# Altium PCB PWR-Buck-Boost 2V to 5V-Layout.PcbDoc
Units mil, origin at the board's own origin, x right, y up, seen from the top; angles counter-clockwise.
Board outline not stored, 2 copper layers (Top Layer, Bottom Layer); 8 components, 0 nets, 22 pads, 9 vias.
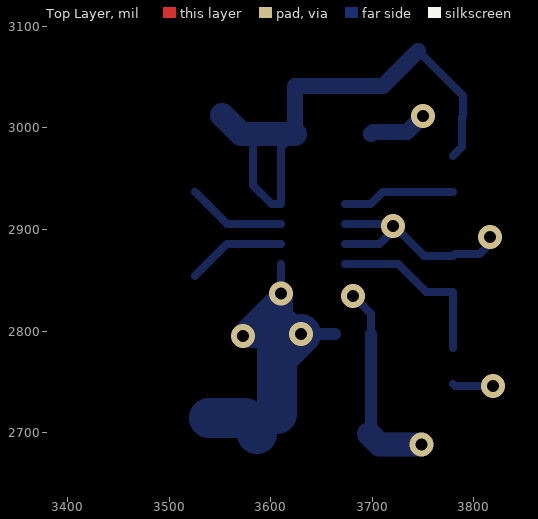
[diagram p0: Top Layer view]
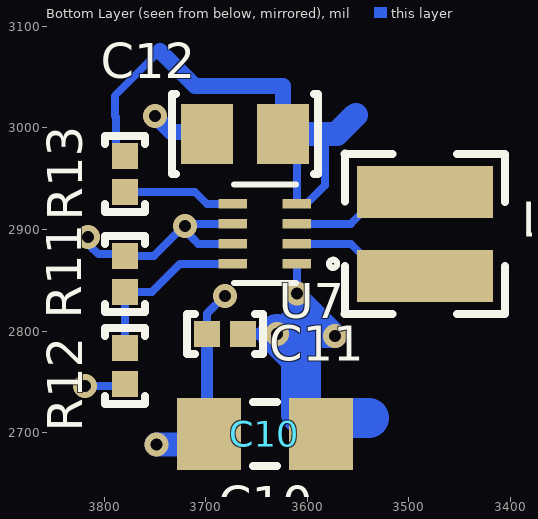
[diagram p1: Bottom Layer view, seen from below]

## Layer stack, top to bottom
Top Solder: solder mask 0.4, Solder Resist, Dk 3.5
Top Layer: signal copper 1.4
Dielectric 1: dielectric 12.6, FR-4, Dk 4.8
Bottom Layer: signal copper 1.4
Bottom Solder: solder mask 0.4, Solder Resist, Dk 3.5

## Components (designator, comment, footprint, x,y, rotation, side; value= is the part's Value field where it differs from the comment)
C10 "Cap 100uF 1206" C_3216[1206] 3641.73,2698.82 r180 bottom value=100uF
C11 "Cap 100nF 0402" C_1005[0402] 3681.1,2797.24 r180 bottom value=100nF
C12 "Cap 10uF 0805" C_2012[0805] 3661.42,2994.09 r180 bottom value=10uF
L1 "Ind 1UH 2.75A 51mOHM SMD" L_3030[1212] 3484.25,2895.67 r270 bottom value=1uH
R11 "Res 91k 1% 0402" R_1005[0402] 3779.53,2856.3 r90 bottom value=91k
R12 "Res 806k 1% 0402" R_1005[0402] 3779.53,2765.75 r270 bottom value=806k
R13 "Res 4k7 1% 0402" R_1005[0402] 3779.53,2954.72 r90 bottom value=4k7
U7 "TPS631000DRLR" U_SOT583_50P210X120X60-8 3641.74,2895.67 r90 bottom

## Footprints (in the part's own frame and the unit in brackets; to place one, negate y for a bottom-side part, rotate by r counter-clockwise, add the part's x,y. Pads: shape width x height; smd on the part's side, far side on the other; paste and mask are expansions set on the pad)
C_1005[0402] [mm] "Chip capacitor; Body 1.1 x 0.5 mm (LxW typ)"
  rect 0.65x0.65 smd: 1(-0.45,0) 2(0.45,0)
  silkscreen extent -0.95,-0.5 0.95,0.5, body extent -0.51,-0.25 0.51,0.25, height 0.51
C_2012[0805] [mm] "Chip Resistor; Body 2.0 x 1.3 mm (LxW typ)"
  rect 1.3x1.5 smd: 1(-0.95,0) 2(0.95,0)
  silkscreen extent -1.83,-1 1.83,1, body extent -1,-0.62 1,0.63, height 0.78
C_3216[1206] [mm] "Capacitor MLCC; Body 3.2 x 1.6 mm (LxW typ)"
  rect 1.6x1.8 smd: 1(-1.4,0) 2(1.4,0)
  silkscreen extent -0.3,-0.8 0.3,0.8, body extent -1.6,-0.8 1.6,0.8, height 1
L_3030[1212] [mm]
  rect 1.3x3.4 smd: 1(-1.05,0) 2(1.05,0)
  silkscreen extent -2.01,-2.01 2.01,2.01, body extent -1.5,-1.5 1.5,1.5, height 1.22
R_1005[0402] [mm] "Chip resistor; Body 1.1 x 0.5 mm (LxW typ)"
  rect 0.65x0.65 smd: 1(-0.45,0) 2(0.45,0)
  silkscreen extent -0.95,-0.5 0.95,0.5, body extent -0.5,-0.25 0.5,0.26, height 0.36
U_SOT583_50P210X120X60-8 [mil] "SOT-583"
  rect 9x28 smd paste+0 mask+0: 1(-29.53,-31.5) 2(-9.84,-31.5) 3(9.84,-31.5) 4(29.53,-31.5) 5(29.53,31.5) 6(9.84,31.5) 7(-9.84,31.5) 8(-29.53,31.5)
  silkscreen extent -48,-71 48,31, body extent -44,-34 44,34, height 27

## Part data
C10: library part CAP005, "Capacitor type 1", Dielectric=X5R, Manufacturer 1=Murata, Manufacturer Part Number 1=GRM31CR61A107MEA8L, Rated Voltage=10V, Supplier Part Number 1=C883598, Tolerance=20%, CEGEP=KCOND04SM, LibRef=CAP005, Mounting Technology=SMT, Supplier 1=LCSC
C11: library part CAP001, "Capacitor type 1", Dielectric=X7R, Manufacturer 1="Taiyo Yuden", Manufacturer Part Number 1=UMK105B7104KV-FR, Rated Voltage=50V, Supplier Part Number 1=C2167491, Tolerance=10%, CEGEP=KCOND01SM, LibRef=CAP001, Mounting Technology=SMT, Supplier 1=LCSC
C12: library part CAP004, "Capacitor type 1", Dielectric=X5R, Manufacturer 1=Samsung, Manufacturer Part Number 1=CL21A106KAYNNNE, Rated Voltage=25V, Supplier Part Number 1=C15850, Tolerance=10%, CEGEP=KCOND03SM, LibRef=CAP004, Mounting Technology=SMT, Supplier 1=LCSC
L1: library part IND001, "Inductor type 1", Manufacturer 1="Murata Electronics", Manufacturer Part Number 1=LQH3NPN1R0MMEL, Saturation Current=2.3A, Supplier Part Number 1=C703777, Tolerance=0,2, CEGEP=KPTSO09, DCR=0.025R, LibRef=IND001, Mounting Technology=SMT, Supplier 1=LCSC
R11: library part RES011, "Resistor type 1", Manufacturer 1=Panasonic, Manufacturer Part Number 1=ERJ-2RKF9102X, Max Working Voltage=50V, Supplier Part Number 1=C413106, Tolerance=1%, LibRef=RES011, Mounting Technology=SMT, Puissance=1/16W, Supplier 1=LCSC
R12: library part RES013, "Resistor type 1", Manufacturer 1=Panasonic, Manufacturer Part Number 1=ERJ-2RKF8063X, Max Working Voltage=50V, Supplier Part Number 1=C416577, Tolerance=1%, LibRef=RES013, Mounting Technology=SMT, Puissance=1/16W, Supplier 1=LCSC
R13: library part RES007, "Resistor type 1", Manufacturer 1=Panasonic, Manufacturer Part Number 1=ERJ-2RKF4701X, Max Working Voltage=50V, Supplier Part Number 1=C400631, Tolerance=1%, LibRef=RES007, Mounting Technology=SMT, Puissance=1/16W, Supplier 1=LCSC
U7: library part U_TPS631000DRLR, "buck-boost converter 1.5-A output current,", Manufacturer 1="Texas Instruments", Supplier Part Number 1=C5219190, Manufacturer Part Number 1=TPS631000DRLR, Mounting Technology=SMT, Supplier 1=LCSC, Supplier 2=Digikey, Supplier Part Number 2=296-TPS631000DRLRCT-ND

## Via types
v1: diameter 23.62, hole 11.81, Top Layer to Bottom Layer, tented both sides, 9 vias

## Nets (pads, with @x,y where several pads share a name; then routed paths per layer and width w, separated by ;. In a path a pad name is that pad's centre, name@x,y a point inside that pad or via, vN(x,y) a via of type N, cw(c..) or ccw(c..) an arc to the next point about the centre after c; other vN are vias at no path point)
pads on no net: C10.1 C10.2 C11.1 C11.2 C12.1 C12.2 L1.1 L1.2 R11.1 R11.2 R12.1 R12.2 R13.1 R13.2 U7.1 U7.2 U7.3 U7.4 U7.5 U7.6 U7.7 U7.8
copper on no net: | length 1980.1
  Bottom Layer w7.87: 3525.59,2854.33 3557.09,2885.83 3610.24,2885.83 ; 3525.59,2937.01 3557.09,2905.51 3610.24,2905.51 ; 3582.68,2994.09 3582.68,2943.25 3600.74,2925.2 3610.24,2925.2 3610.24,2980.31 3624.02,2994.09 ; v1(3610.24,2836.94) 3610.24,2866.14 ; 3673.24,2866.14 3725.25,2866.14 3752.81,2838.58 3779.53,2838.58 3779.53,2783.46 ; 3673.24,2885.83 3707.31,2885.83 3711.89,2890.41 3711.89,2890.7 3720.47,2899.28 v1(3720.47,2903.54) ; 3673.24,2905.51 3718.51,2905.51 v1(3720.47,2903.54) ; 3673.24,2925.2 3698.82,2925.2 3710.63,2937.01 3779.53,2937.01 ; v1(3681.1,2834.65) 3698.51,2817.24 3698.51,2797.55 3698.82,2797.24 ; 3745.08,3075.79 3789.37,3031.5 3789.37,3011.81 3788.39,3010.83 3788.39,2981.3 3779.53,2972.44 ; 3779.53,2748.03 3781.5,2746.06 v1(3818.9,2746.06) ; v1(3815.68,2892.52) 3812.66,2889.5 3812.66,2882.73 3805.62,2875.69 3781.2,2875.69 3779.53,2874.02 3750.92,2874.02 3721.39,2903.54 v1(3720.47,2903.54)
  Bottom Layer w11.81: v1(3629.92,2797.24) 3663.39,2797.24 ; 3696.85,2698.82 3698.82,2700.79 3698.82,2797.24
  Bottom Layer w15.75: 3624.02,2994.09 3624.02,3041.34 3632.87,3041.34 3641.73,3041.34 3671.26,3041.34 3690.94,3041.34 3710.63,3041.34 3745.08,3075.79 ; 3698.82,2994.09 3700.79,2996.06 3734.25,2996.06 v1(3750,3011.81)
  Bottom Layer w23.62: 3552.17,3012.8 3570.87,2994.09 3582.68,2994.09 3624.02,2994.09 ; 3586.61,2698.82 3606.3,2718.5 ; v1(3610.24,2836.94) v1@3610.24,2832.68 ; v1(3629.92,2797.24) 3628.12,2797.24 3610.24,2815.12 ; 3696.85,2698.82 3707.23,2688.44 v1(3748.44,2688.44) ; 3610.24,2815.12 3610.24,2793.31 3608.27,2795.28 v1(3572.83,2795.28) v1@3610.24,2832.68 ; 3610.24,2815.12 v1@3610.24,2832.68
  Bottom Layer w39.37: 3539.37,2714.57 3574.8,2714.57 3586.61,2702.76 3586.61,2698.82 ; 3606.3,2718.5 3606.3,2773.62 ; v1(3629.92,2797.24) 3618.11,2785.43 ; 3606.3,2773.62 3618.11,2785.43 ; 3606.3,2773.62 3606.3,2789.37 3610.24,2793.31 3618.11,2785.43